# Altium PCB PCB1.PcbDoc
Units mil, origin at the board's own origin, x right, y up, seen from the top; angles counter-clockwise.
Board outline 2550 x 3305 mil, 2 copper layers (Top Layer, Bottom Layer); 31 components, 15 nets, 108 pads, 2 vias.
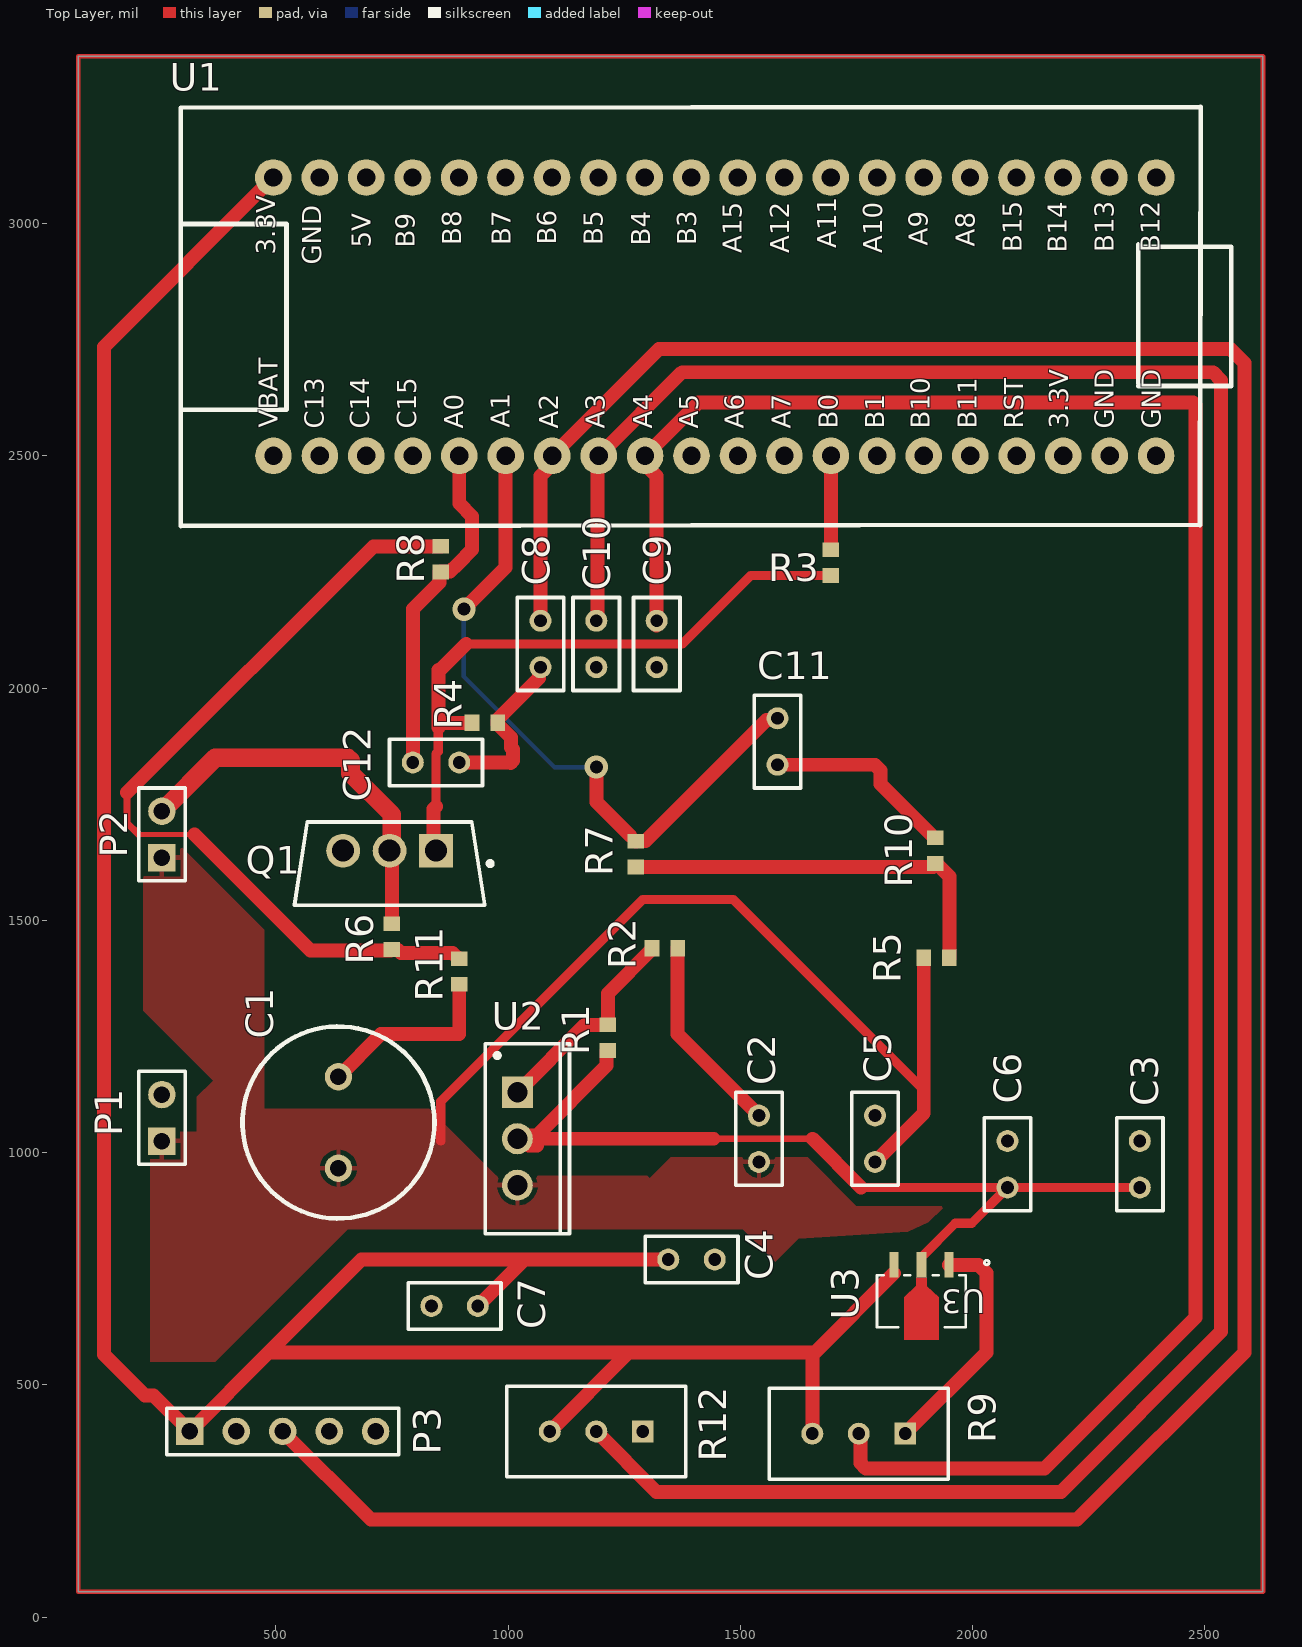
[diagram p0: Top Layer view]
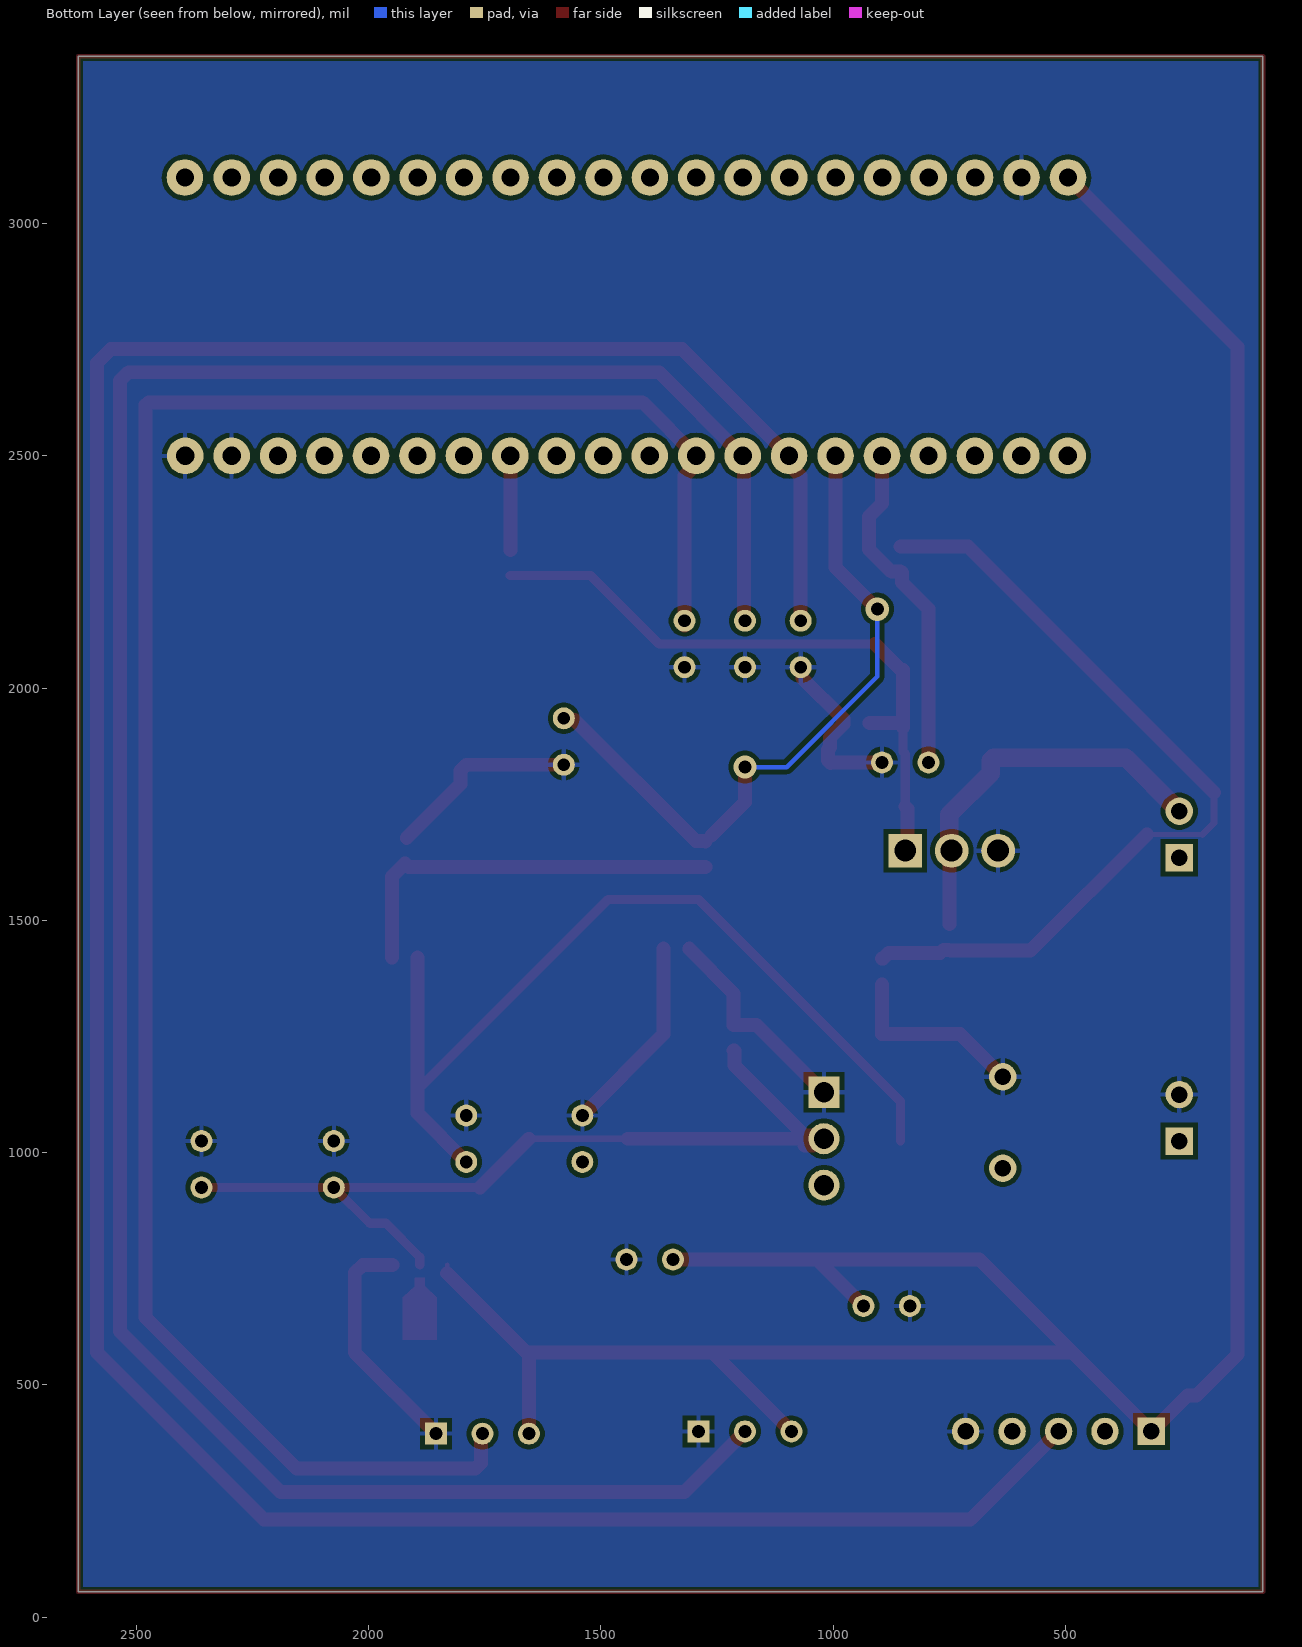
[diagram p1: Bottom Layer view, seen from below]

## Layer stack, top to bottom
Top Solder: solder mask 0.4, Solder Resist, Dk 3.5
Top Layer: signal copper 1.4
Dielectric 1: dielectric 12.6, FR-4, Dk 4.8
Bottom Layer: signal copper 1.4
Bottom Solder: solder mask 0.4, Solder Resist, Dk 3.5

## Board outline
75,55 75,3360 2625,3360 2625,55

## Design rules (kind name [scope] priority, off if disabled: settings)
BoardOutlineClearance [All] p1: gap=10 ignorepadtopadclearanceinfootprint=FALSE except(0: Arc-SplitContinuation Track-SplitContinuation SMDPad-SplitContinuation THPad-SplitContinuation Via-SplitContinuation Fill-SplitContinuation Poly-SplitContinuation Region-SplitContinuation Text-SplitContinuation)
Clearance [All] p1: gap=10 ignorepadtopadclearanceinfootprint=FALSE except(0: Arc-Hole Track-Hole SMDPad-Hole THPad-Hole Via-Hole Fill-Hole Poly-Hole Region-Hole Text-Hole)
PolygonConnect [All] p1: connectstyle=Relief reliefconductorwidth=10 reliefentries=4 polygonreliefangle="90 Angle" airgapwidth=10
RoomDefinition MainBoard [InComponentClass('MainBoard')] p1: confinementstyle=ConfineIn formatcopy=TRUE lockcomponents=FALSE outline -890,-1610 1110,-1610 1110,-610 -890,-610
RoutingVias [All] p1: holewidth=28 width=50 viastyle="Through Hole" minholewidth=28 minwidth=50 maxholewidth=28 maxwidth=50
SolderMaskExpansion [All] p1: expansion=4 istentingtop=FALSE
Width [All] p1: maxlimit=50 minlimit=10 preferedwidth=10
30 further rules are at their usual default settings.

## Components (designator, comment, footprint, x,y, rotation, side; value= is the part's Value field where it differs from the comment)
C1 "Cap Pol2" RB5-10.5 635,1065 r90 top value=100uF
C2 "Cap Pol3" RAD-0.1 1540,1030 r90 top value=10u
C3 "Cap Pol3" RAD-0.1 2360,975 r90 top value=100u
C4 "Cap Pol3" RAD-0.1 1395,770 r0 top value=100u
C5 "Cap Semi" RAD-0.1 1790,1030 r270 top value=100nF
C6 "Cap Semi" RAD-0.1 2075,975 r270 top value=100nF
C7 "Cap Semi" RAD-0.1 885,670 r0 top value=100nF
C8 "Cap Semi" RAD-0.1 1070,2095 r270 top value=100nF
C9 "Cap Semi" RAD-0.1 1320,2095 r270 top value=100nF
C10 "Cap Semi" RAD-0.1 1190,2095 r270 top value=100nF
C11 "Cap Semi" RAD-0.1 1580,1885 r90 top value=100nF
C12 "Cap Semi" RAD-0.1 845,1840 r180 top value=100nF
P1 "Power" HDR1X2 255,1025 r90 top
P2 "Motor" HDR1X2 255,1635 r90 top
P3 "Header 5" HDR1X5 315,400 r0 top
Q1 "IRLZ44NPbF" FP-PG-TO220-3-MFG 745,1622.24 r270 top
R1 "Res1" 1608[0603] 1215,1247.56 r270 top value=180
R2 "Res1" 1608[0603] 1337.44,1440 r180 top value=1.8k
R3 "Res1" 1608[0603] 1695,2270 r90 top value=100
R4 "Res1" 1608[0603] 950,1925 r180 top value=10K
R5 "Res1" 1608[0603] 1922.44,1420 r180 top value=20K
R6 "Res1" 1608[0603] 750,1465 r90 top value=20K
R7 "Res1" 1608[0603] 1275,1642.44 r90 top value=10K
R8 "Res1" 1608[0603] 855,2277.44 r270 top value=10K
R9 "3296W-1-253LF" FP-3296W-MFG 1755,395 r90 top
R10 "Res1" 1608[0603] 1920,1650 r270 top value=2.2K
R11 "Res1" 1608[0603] 895,1390 r90 top value=2.2K
R12 "3296W-1-253LF" FP-3296W-MFG 1190,399.8 r90 top
U1 "STM32F103C8T6" "Stm32 BluePill" 1218.07,2790.8 r90 top
U2 "LM317T" TO-220 1020,1030 r270 top
U3 "HT7333A" SOT_7136-1_HLT 1890,680 r180 top

## Footprints (in the part's own frame and the unit in brackets; to place one, negate y for a bottom-side part, rotate by r counter-clockwise, add the part's x,y. Pads: shape width x height; smd on the part's side, far side on the other; paste and mask are expansions set on the pad)
1608[0603] [mm] "Chip Capacitor, Body 1.6x0.8mm, IPC High Density"
  rect 0.8x0.9 smd: 1(-0.7,0) 2(0.7,0)
  body extent -0.87,-0.48 0.87,0.48, height 1.3
FP-3296W-MFG [mm]
  rect 1.2x1.2 hole 0.7 paste-1000 mask+0: 1(0.005,-2.54)
  round 1.2 hole 0.7 paste-1000 mask+0: 2(0.005,0) 3(0.005,2.54)
  silkscreen extent -2.48,-4.89 2.48,4.89, body extent -2.58,-4.99 2.58,4.99, height 0.25
FP-PG-TO220-3-MFG [mm]
  rect 1.85x1.85 hole 1.2 paste-1000 mask+0: 1(-0.705,2.54)
  round 1.85 hole 1.2 paste-1000 mask+0: 2(-0.705,0) 3(-0.705,-2.54)
  silkscreen extent -2.27,-5.2 2.27,5.63, body extent -2.37,-5.55 2.37,5.55, height 0.25
HDR1X2 [mm] "Connector; Header; 2 Position"
  rect 1.5x1.5 hole 0.9: 1(0,0)
  round 1.5 hole 0.9: 2(2.54,0)
  silkscreen extent -1.27,-1.27 3.81,1.27
HDR1X5 [mm] "Connector; Header; 5 Position"
  rect 1.5x1.5 hole 0.9: 1(0,0)
  round 1.5 hole 0.9: 2(2.54,0) 3(5.08,0) 4(7.62,0) 5(10.16,0)
  silkscreen extent -1.27,-1.27 11.43,1.27
RAD-0.1 [mm] "Radial Cap, Thru-Hole; 2 Leads; 0.1 in Pin Spacing"
  round 1.2 hole 0.7: 1(-1.27,0) 2(1.27,0)
  silkscreen extent -2.54,-1.27 2.54,1.27
RB5-10.5 [mm] "Capacitor (Radial); 2 Leads"
  round 1.5 hole 0.9: 1(-2.5,0) 2(2.5,0)
  silkscreen extent -5.25,-5.25 5.25,5.25
SOT_7136-1_HLT [mil]
  rect 19x55 smd paste+0 mask+0: 1(-59,-78.5) 3(59,-78.5)
  rect 22x55 smd paste+0 mask+0: 2(0,-78.5)
  Top Layer region: 11,-51 -11,-51 -11,-33 -37,-9 -37,83 37,83 37,-9 11,-34
  silkscreen extent -146,-88 96,56
"Stm32 BluePill" [mm]
  round 2 hole 1: 1(7.828,-29.909) 2(7.828,-27.343) 3(7.828,-24.803) 4(7.828,-22.263) 5(7.828,-19.723) 6(7.828,-17.183) 7(7.828,-14.643) 8(7.828,-12.103) 9(7.828,-9.563) 10(7.828,-7.023) 11(7.828,-4.483) 12(7.828,-1.943) 13(7.828,0.597) 14(7.828,3.137) 15(7.828,5.677) 16(7.828,8.217) 17(7.828,10.757) 18(7.828,13.297) 19(7.828,15.837) 20(7.828,18.377) 21(-7.386,18.366) 22(-7.386,15.826) 23(-7.386,13.286) 24(-7.386,10.746) 25(-7.386,8.206) 26(-7.386,5.666) 27(-7.386,3.126) 28(-7.386,0.586) 29(-7.386,-1.954) 30(-7.386,-4.494) 31(-7.386,-7.034) 32(-7.386,-9.574) 33(-7.386,-12.114) 34(-7.386,-14.654) 35(-7.386,-17.194) 36(-7.386,-19.734) 37(-7.386,-22.274) 38(-7.386,-24.814) 39(-7.386,-27.354) 40(-7.386,-29.894)
  silkscreen extent -11.22,-34 11.69,23.43, body extent -11.18,-33.27 11.68,24.29, height 12.31
TO-220 [mm] "TO, Thru-Hole, Vertical, Heatsink Mounted; 3 In-Line Leads; Pitch 2.54 mm"
  rect 1.7x1.7 hole 1.1: 1(-2.54,0)
  round 1.7 hole 1.1: 2(0,0) 3(2.54,0)
  silkscreen extent -5.2,-1.75 5.2,2.85, body extent -5.25,-1.8 5.25,2.9, height 19.7

## Part data
C1: "Polarized Capacitor (Axial)", LatestRevisionDate=17-Jul-2002, LatestRevisionNote="Re-released for DXP Platform.", PackageDescription="Polarized Capacitor; 2 Leads", PackageReference=POLAR0.8, Published=8-Jun-2000, Publisher="Altium Limited"
C2 C3 C4: "Polarized Capacitor (Surface Mount)", LatestRevisionDate=29-May-2009, LatestRevisionNote="IPC-7351 Footprint Added.", PackageDescription="Chip Capacitor", PackageReference=C0805, Published=8-Jun-2000, Publisher="Altium Limited"
C5 C6 C7 C8 C9 C10 C11 C12: "Capacitor (Semiconductor SIM Model)", LatestRevisionDate=29-May-2009, LatestRevisionNote="IPC-7351 Footprint Added.", PackageDescription="Chip Capacitor", PackageReference=C1206, Published=8-Jun-2000, Publisher="Altium Limited"
P1 P2: library part "Header 2", "Header, 2-Pin", LatestRevisionDate=17-Jul-2002, LatestRevisionNote="Re-released for DXP Platform.", Publisher="Altium Limited"
P3: "Header, 5-Pin", LatestRevisionDate=17-Jul-2002, LatestRevisionNote="Re-released for DXP Platform.", Publisher="Altium Limited"
Q1: library part CMP-32901-000488-1, "MOSFET N-CH 55V 47A TO220AB", Case/Package=TO-220, Continuous Drain Current (ID)=47A, Drain to Source Breakdown Voltage=55V, Drain to Source Resistance=35mR, Gate to Source Voltage (Vgs)=16V, Input Capacitance=1.7nF, Max Operating Temperature=175°C, Max Power Dissipation=110W, Min Operating Temperature=-55°C, Threshold Voltage=2V, Drain to Source Voltage (Vdss)=55V, Element Configuration=Single, Halogen Free="Halogen Free", Height=0.6inch, Lead Free="Lead Free", Length=0.414inch, Max Dual Supply Voltage=55V, Mount="Through Hole", Number of Pins=3, Packaging=Rail/Tube, Power Dissipation=110W, Rds On Max=22mR, REACH SVHC="No SVHC", RoHS Compliant=Yes, Turn-Off Delay Time=26ns, Turn-On Delay Time=11ns, Width=0.185inch
R1 R2 R3 R4 R5 R6 R7 R8 R10 R11: "Resistor", LatestRevisionDate=17-Jul-2002, LatestRevisionNote="Re-released for DXP Platform.", PackageDescription="Axial Device, Thru-Hole; 2 Leads; 0.3 in Pin Spacing", PackageReference=AXIAL-0.3, Published=8-Jun-2000, Publisher="Altium Limited"
R9 R12: library part CMP-07234-000034-1, "TRIMMER 25K OHM 0.5W PC PIN TOP", Color=Blue, Max Operating Temperature=125°C, Max Power Dissipation=500mW, Min Operating Temperature=-55°C, Package Quantity=50, Resistance=25kR, Resistance Tolerance=10%, Resistor Type=Cermet, Temperature Coefficient=100ppm/°C, Voltage Rating (DC)=300V, Depth=4.83mm, Height=0.395inch, Lead Free="Lead Free", Length=9.53mm, Military Standard=Not, Mount=Panel, Number of Turns=25, Packaging=Rail/Tube, Power Rating=500mW, Radiation Hardening=No, REACH SVHC="No SVHC", RoHS Compliant=Yes, Series=3296, Taper=Linear, Technology=CERMET, Termination=Pin, Tolerance=10%, Weight=0.03oz, Width=9.53mm
U1: library part BluePill, "Designed By @Alixahedi"
U2: library part CMP-0244-00444-1, "1.5A, 1.2V to 37V Adjustable Voltage Regulator, 3-Pin TO-220", ComponentLink1Description="Manufacturer URL", ComponentLink1URL=http://www.st.com, ComponentLink2Description=Datasheet, ComponentLink2URL=http://www.st.com/internet/com/TECHNICAL_RESOURCES/TECHNICAL_LITERATURE/DATASHEET/CD00000455.pdf, ComponentLink3Description="Package Specification", ComponentLink3URL=http://www.st.com/internet/com/TECHNICAL_RESOURCES/TECHNICAL_LITERATURE/PACKAGE_INFORMATION/CD00004649.pdf, DatasheetVersion=1/11/2011, PackageDescription="TO, Thru-Hole, Vertical, Heatsink Mounted; 3 In-Line Leads; Pitch 2.54 mm", PackageReference=TO-220, PackageVersion=2011
U3: "Description", Manufacturer_Name=Holtek, Copyright="Copyright (C) 2026 Ultra Librarian. All rights reserved.", Manufacturer_Part_Number=HT7333A, RefDes=RefDes, Type=Type

## Via types
v1: diameter 50, hole 28, Top Layer to Bottom Layer, 2 vias

## Nets (pads, with @x,y where several pads share a name; then routed paths per layer and width w, separated by ;. In a path a pad name is that pad's centre, name@x,y a point inside that pad or via, vN(x,y) a via of type N, cw(c..) or ccw(c..) an arc to the next point about the centre after c; other vN are vias at no path point)
+3.3v: C4.1 C7.2 P3.1 R9.3 R12.3 U1.20 U3.3 | length 6114.3
  Top Layer w10: 1655,564.5 1660.25,569.75 ; U3.3@1831,740.5 U3.3
  Top Layer w30: U1.20 130,2734.43 130,565.86 218.17,477.69 237.31,477.69 P3.1 484.75,569.75 ; C7.2 1035,770 ; R12.3 1259.75,569.75 ; C4.1 1035,770 ; R9.3 1655,564.5 ; U3.3@1831,740.5 1660.25,569.75 1259.75,569.75 ; 484.75,569.75 685,770 1035,770 ; 484.75,569.75 1259.75,569.75
a0: C12.2 R8.2 U1.25 | length 740.8
  Top Layer w10: 888.03,2267.44 890,2267.44 891.97,2267.44
  Top Layer w30: C12.2 795,2170.47 852.28,2227.76 852.28,2249.13 853.03,2249.88 R8.2 855.75,2250.63 875.16,2250.63 891.97,2267.44 922.72,2298.19 922.72,2369.36 895,2397.08 U1.25
a1: C11.2 R7.2 U1.26 | length 1496.8
  Top Layer w10: R7.2@1262.28,1682.72 1262.28,1680.75 1273.03,1670 R7.2 ; C11.2@1570,1945 C11.2
  Top Layer w30: v1@910,2175 995,2260 U1.26 ; v1(1190,1830) 1190,1755 R7.2@1262.28,1682.72 ; R7.2 1275.75,1670.75 1295.75,1670.75 1556.7,1931.7 1572.03,1931.7 1574.37,1934.03 C11.2@1574.37,1940.63
  Bottom Layer w10: v1(905,2170) 905,2025 1100,1830 v1(1190,1830)
a2: C8.1 P3.3 U1.27 | length 6390.9
  Top Layer w10: U1.27@1095,2481.4 U1.27
  Top Layer w30: P3.3 705,210 2225,210 2585,570 2585,2700 2555,2730 1325,2730 U1.27 ; C8.1 1070,2456.4 U1.27@1095,2481.4
a3: C10.1 R12.2 U1.28 | length 5373.1
  Top Layer w10: C10.1@1190,2140 C10.1@1192.5,2142.5 ; U1.28@1192.5,2497.5 U1.28
  Top Layer w30: R12.2 1320,270 2190,270 2535,615 2535,2662.43 2517.43,2680 1375,2680 U1.28 ; C10.1@1192.5,2142.5 U1.28@1192.5,2497.5
a4: C9.1 R9.2 U1.29 | length 4500.6
  Top Layer w10: U1.29@1295,2481.4 U1.29 ; 2474.14,2615 2480,2609.14
  Top Layer w30: U1.29@1295,2481.4 1320,2456.4 C9.1 C9.1@1320,2135 ; U1.29 1410,2615 2474.14,2615 ; R9.2 1758.3,391.9 1758.3,331.7 1770,320 2155,320 2480,645 2480,2609.14
d3: R3.2 U1.33 | length 202.4
  Top Layer w30: R3.2 U1.33
gnd: C1.2 C2.2 C3.2 C4.2 C5.1 C6.1 C7.1 C8.2 C9.2 C10.2 C11.1 C12.1 P1.2 P3.5 Q1.3 R2.1 R4.1 R9.1 R10.1 R11.1 R12.1 U1.19 U1.39 U1.40 U3.1 | length 2143.2
  Top Layer w10: R4.1@977.56,1923.03 R4.1@977.56,1932.44 ; R10.1@1918.03,1677.56 R10.1
  Top Layer w30: C1.2 726.57,1255 895,1255 R11.1 ; C12.1 1005,1840 1005.86,1839.14 1010.86,1844.14 1010.86,1867.57 1006.72,1871.72 1006.72,1893.87 R4.1@977.56,1923.03 ; R4.1@977.56,1927.72 978.31,1927.72 978.31,1933.19 1066.7,2021.58 1066.7,2041.7 C8.2 ; R2.1 1365,1255 C2.2 ; C11.1 1790,1835 1802.13,1822.87 1802.13,1793.46 R10.1@1918.03,1677.56 ; R9.1 2030,570.2 2030,740.93 2012.43,758.5 U3.1
MottorSwitch: P2.2 Q1.2 R6.2 | length 844.4
  Top Layer w10: 655,1850 660.86,1844.14
  Top Layer w30: R6.2 Q1.2@750,1650
  Top Layer w40: P2.2 370,1850 655,1850 ; 660.86,1844.14 660.86,1816.9 750,1727.76 Q1.2@750,1650
NetC3_1: C3.1 C6.2 R1.2 U2.2 U3.2 | length 1952.8
  Top Layer w15: 1442.84,1030 1655,1030
  Top Layer w20: 1760,925 C6.2 ; U3.2 1890,775 1962.89,847.89 1997.89,847.89 C6.2 ; C3.1 C6.2
  Top Layer w30: U2.2 1029.99,1030 1044.99,1015 1062.07,1015 ; U2.2@1027.07,1037.07 1062.07,1037.07 1212.28,1187.28 1212.28,1219.25 1213.03,1220 R1.2 ; U2.2@1044.99,1030 1442.84,1030 ; 1655,1030 1760,925
NetQ1_1: Q1.1 R3.1 R4.2 | length 1408.2
  Top Layer w10: 850,1915 860,1925 ; 850,2039.14 850.86,2040 855,2040
  Top Layer w20: Q1.1 Q1.1@850,1655 ; 845,1745 845,1858.76 850,1863.76 850,1915 ; 910,2095 1375,2095 1522.44,2242.44 R3.1
  Top Layer w30: Q1.1 840,1655 840,1740 845,1745 ; 850,1915 850,2039.14 ; 855,2040 910,2095 ; 860,1925 R4.2
NetR1_1: R1.1 R2.2 U2.1 | length 459.3
  Top Layer w30: U2.1 1165.12,1275.12 R1.1 1215,1343.15 1309.88,1438.03 R2.2
NetR5_1: R5.1 R7.1 R10.2 | length 864.2
  Top Layer w10: R10.2@1914.41,1614.88 R10.2@1921.97,1622.44
  Top Layer w30: R7.1 R10.2@1914.41,1614.88 ; R10.2@1921.97,1622.44 1950,1594.41 R5.1
NetR6_1: R6.1 R8.1 R11.2 | length 1805.2
  Top Layer w10: 205,1685 325,1685 ; R6.1@747.56,1435 R6.1 R6.1@757.44,1430
  Top Layer w15: 180,1775 180,1710 205,1685
  Top Layer w30: 180,1775 710,2305 R8.1 ; 325,1685 575,1435 R6.1@747.56,1435 ; R6.1@752.72,1436.69 763,1436.69 769.69,1430 880.59,1430 893.03,1417.56 R11.2
power+: C1.1 C2.1 C5.2 P1.1 P2.1 R5.2 U2.3 | length 1966.6
  Top Layer w15: C5.2 C5.2@1795.86,974.14
  Top Layer w20: 855,1025 855,1110 1290,1545 1484.88,1545 1894.88,1135
  Top Layer w30: C5.2 1894.88,1084.88 1894.88,1135 R5.2
pads on no net: P3.2 P3.4 U1.1 U1.2 U1.3 U1.4 U1.5 U1.6 U1.7 U1.8 U1.9 U1.10 U1.11 U1.12 U1.13 U1.14 U1.15 U1.16 U1.17 U1.18 U1.21 U1.22 U1.23 U1.24 U1.30 U1.31 U1.32 U1.34 U1.35 U1.36 U1.37 U1.38
copper on no net: | length 11710
  Top Layer w10: 75,55 2625,55 2625,3360 75,3360 75,55

## Polygon pours and split planes (outlines as drawn)
power+ on Top Layer "POWER+_L01_P002" (solid, pour order 2): 235,1025 230,1020 230,550 370,550 655,835 1505,835 1575,765 1625,815 1860,830 1905,850 1940,885 1750,885 1645,990 1350,990 1305,945 1300,950 975,950 830,1095 475,1095 475,1480 290,1665 210,1665 215,1660 215,1305 365,1155 330,1120 330,1045 230,1045 260,1015 230,1030
gnd on Bottom Layer "GND_L02_P003" (solid, pour order 3): 75,3360 70,3355 70,55 2615,55 2620,60 2620,3375

## Text inside footprints (layer, text, board x,y; h text height)
U1: Top Overlay "5V" at 718.34,2948 h70 r90; Top Overlay "B9" at 813.34,2948 h70 r90; Top Overlay "B8" at 913.34,2953 h70 r90; Top Overlay "3.3V" at 513.3,2933 h70 r90; Top Overlay "GND" at 612.34,2910.8 h70 r90; Top Overlay "A5" at 1423.34,2558 h70 r90; Top Overlay "A2" at 1122.07,2558 h70 r90; Top Overlay "A3" at 1222.3,2558 h70 r90; Top Overlay "A4" at 1324.07,2558 h70 r90; Top Overlay "RST" at 2123.34,2558 h70 r90; Top Overlay "B10" at 1921.34,2558 h70 r90; Top Overlay "B11" at 2023.07,2558 h70 r90; Top Overlay "A6" at 1521.34,2558 h70 r90; Top Overlay "A7" at 1623.07,2558 h70 r90; Top Overlay "B0" at 1723.34,2558 h70 r90; Top Overlay "B1" at 1824.07,2558 h70 r90; Top Overlay "3.3V" at 2220.3,2558 h70 r90; Top Overlay "B15" at 2119.34,2938.4 h70 r90; Top Overlay "A8" at 2018.34,2950.5 h70 r90; Top Overlay "A11" at 1720.07,2947.2 h70 r90; Top Overlay "B3" at 1419.3,2953 h70 r90; Top Overlay "A9" at 1917.34,2951.7 h70 r90; Top Overlay "A15" at 1517.34,2935.9 h70 r90; Top Overlay "A12" at 1619.07,2935.9 h70 r90; Top Overlay "A10" at 1819.34,2935.9 h70 r90; Top Overlay "VBAT" at 518.07,2560.85 h70 r90; Top Overlay "B5" at 1218.34,2953 h70 r90; Top Overlay "B14" at 2217.07,2937.2 h70 r90; Top Overlay "B7" at 1020.07,2953 h70 r90; Top Overlay "B4" at 1320.07,2951.7 h70 r90; Top Overlay "B6" at 1117.34,2954.2 h70 r90; Top Overlay "C15" at 816.34,2558 h70 r90; Top Overlay "C13" at 617.3,2558 h70 r90; Top Overlay "C14" at 715.34,2558 h70 r90; Top Overlay "A0" at 917.34,2558 h70 r90; Top Overlay "A1" at 1018.07,2560.8 h70 r90; Top Overlay "GND" at 2318.34,2558 h70 r90; Top Overlay "B13" at 2318.3,2938 h70 r90; Top Overlay "GND" at 2419.34,2558 h70 r90; Top Overlay "B12" at 2417.07,2938.4 h70 r90